# Altium PCB PCB.PcbDoc
Units mil, origin at the board's own origin, x right, y up, seen from the top; angles counter-clockwise.
Board outline 2100 x 4000 mil, 2 copper layers (Top Layer, Bottom Layer); 3 components, 8 nets, 100 pads, 1 vias.
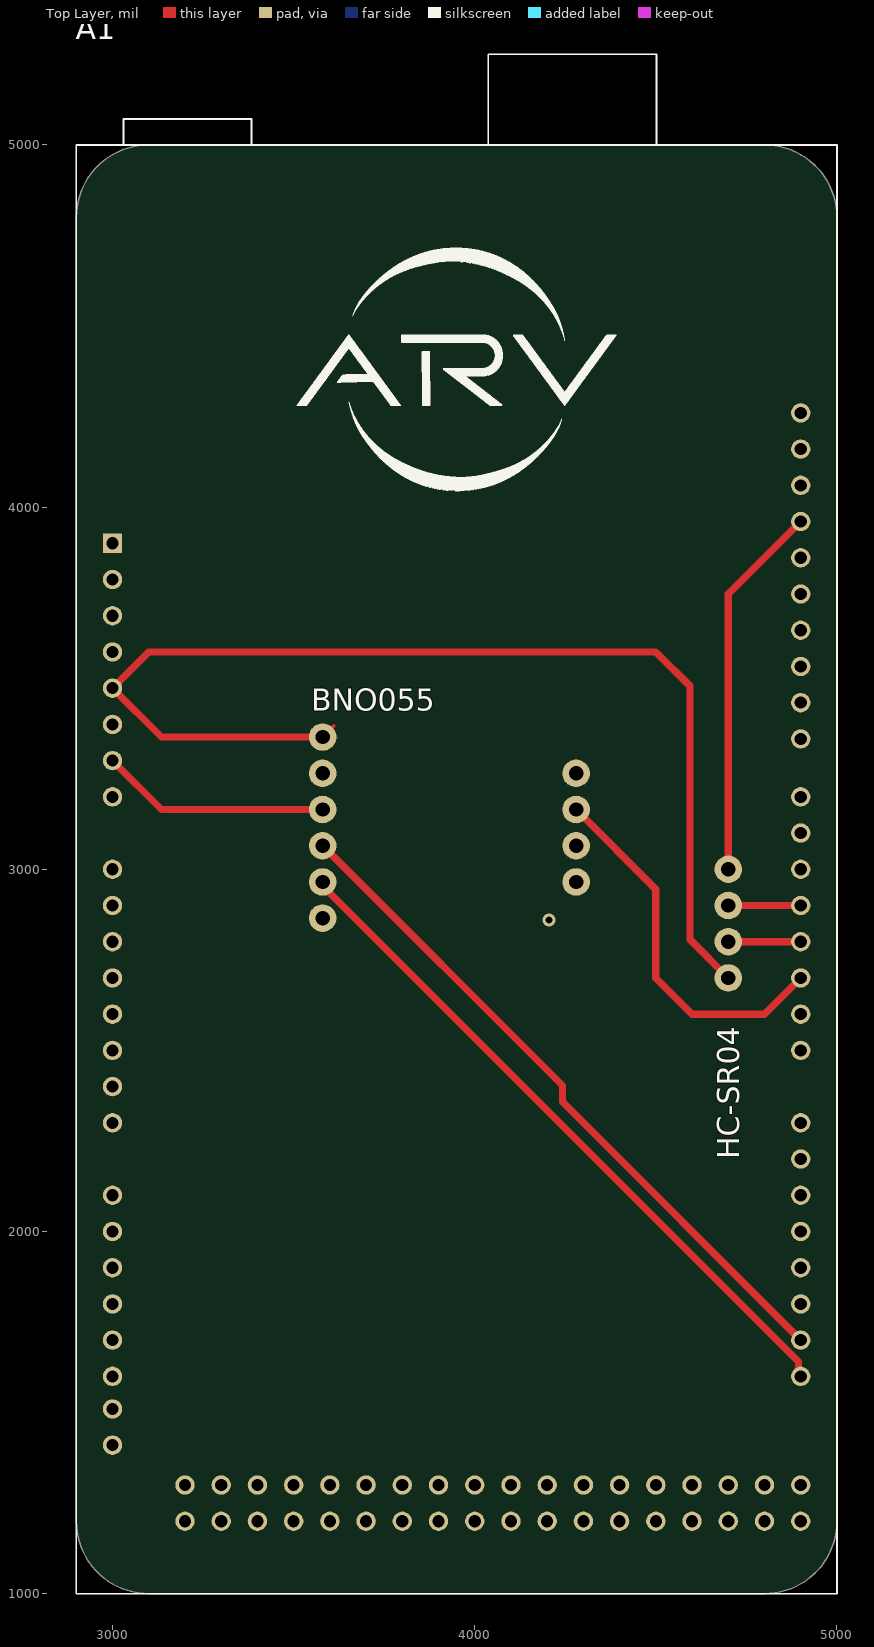
[diagram p0: Top Layer view]
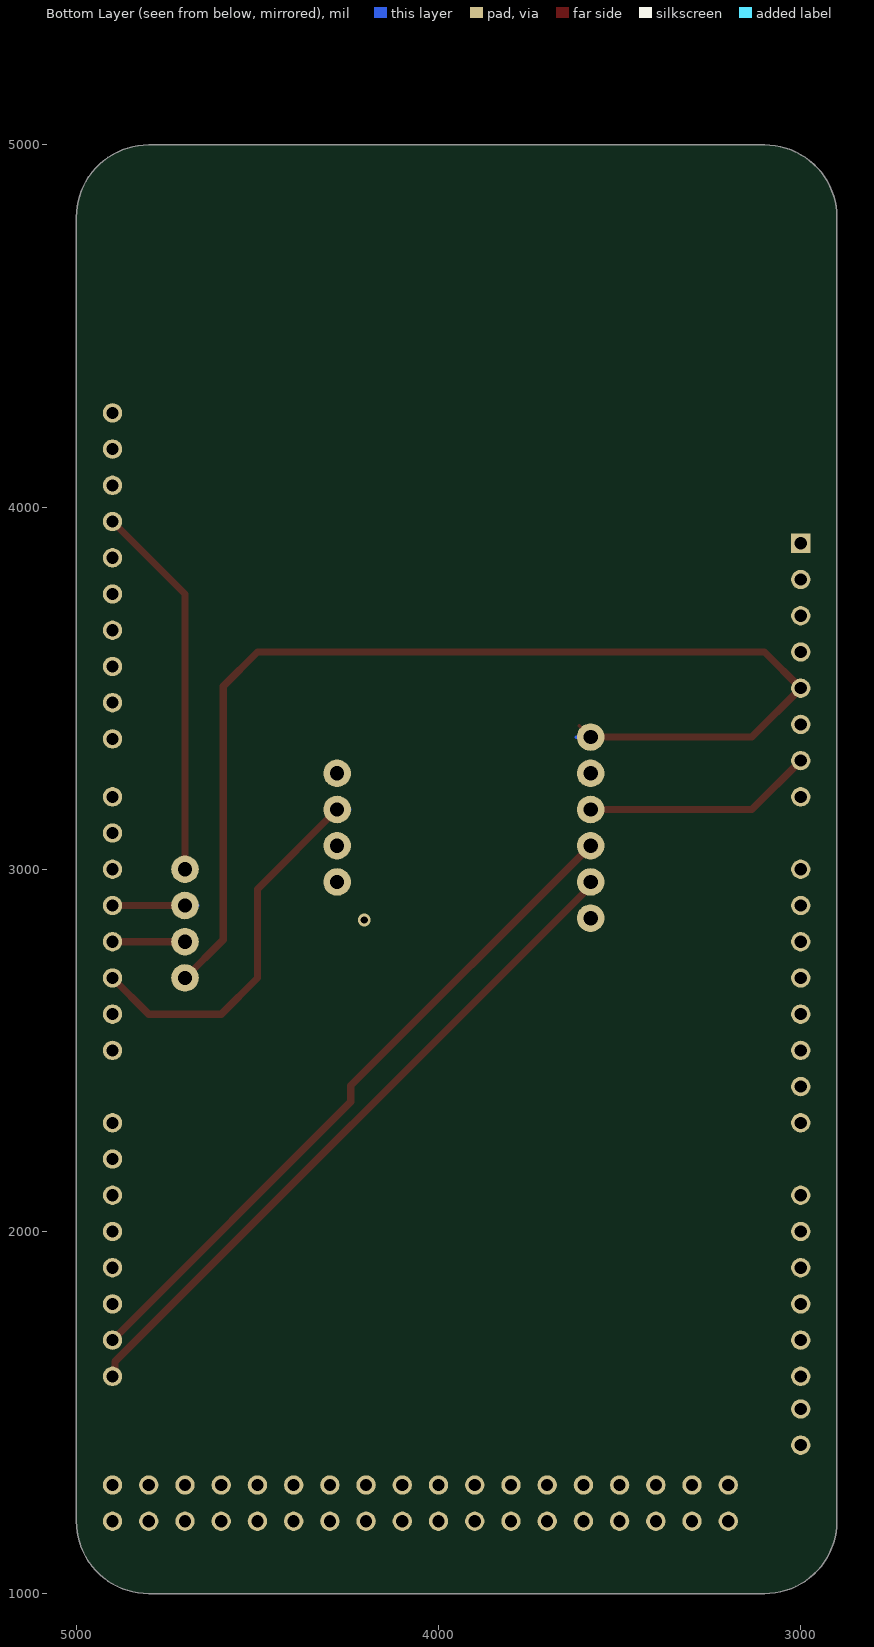
[diagram p1: Bottom Layer view, seen from below]

## Layer stack, top to bottom
Top Solder: solder mask 0.4, Solder Resist, Dk 3.5
Top Layer: signal copper 1.4
Dielectric 1: dielectric 12.6, FR-4, Dk 4.8
Bottom Layer: signal copper 1.4
Bottom Solder: solder mask 0.4, Solder Resist, Dk 3.5

## Board outline
2900,1200 2900,4800 cw(c3100,4800) 3100,5000 4800,5000 cw(c4800,4800) 5000,4800 5000,1200 cw(c4800,1200) 4800,1000 3100,1000 cw(c3100,1200)

## Design rules (kind name [scope] priority, off if disabled: settings)
Clearance [All] p1: gap=10 ignorepadtopadclearanceinfootprint=FALSE
PolygonConnect [All] p1: connectstyle=Relief reliefconductorwidth=10 reliefentries=4 polygonreliefangle="90 Angle" airgapwidth=10
RoutingVias [All] p1: holewidth=28 width=50 viastyle="Through Hole" minholewidth=28 minwidth=50 maxholewidth=28 maxwidth=50
SolderMaskExpansion [All] p1: expansion=4 istentingtop=FALSE
SupplyNets "Schematic Supply Nets_1" [InNet('GND3')] p1: voltage=0.000
SupplyNets "Schematic Supply Nets" [InNet('GND')] p2: voltage=0.000
Width [All] p1: maxlimit=20 minlimit=10 preferedwidth=20 minimp=50.000000 maximp=50.000000 favimp=50.000000
30 further rules are at their usual default settings.

## Components (designator, comment, footprint, x,y, rotation, side; value= is the part's Value field where it differs from the comment)
A1 "A000067" ARDUINO_A000067 3950,3000 r0 top
BNO055 "Adafruit BNO055" PCBComponent_1#1 3900,3200 r270 top
HC-SR04 "Component_1" PCBComponent_1#2 4470,2810 r270 top

## Footprints (in the part's own frame and the unit in brackets; to place one, negate y for a bottom-side part, rotate by r counter-clockwise, add the part's x,y. Pads: shape width x height; smd on the part's side, far side on the other; paste and mask are expansions set on the pad)
ARDUINO_A000067 [mm]
  round 1.358 hole 0.85: 0(24.13,-12.7) 1(24.13,-10.16) 2(24.13,-7.62) 3(24.13,-5.08) 3V3(-24.13,15.24) 4(24.13,-2.54) 5(24.13,0) 5V_1(-24.13,12.7) 5V_2(24.13,-43.18) 5V_3(24.13,-45.72) 6(24.13,2.54) 7(24.13,5.08) 8(24.13,9.144) 9(24.13,11.684) 10(24.13,14.224) 11(24.13,16.764) 12(24.13,19.304) 13(24.13,21.844) 14(24.13,-17.78) 15(24.13,-20.32) 16(24.13,-22.86) 17(24.13,-25.4) 18(24.13,-27.94) 19(24.13,-30.48) 20(24.13,-33.02) 21(24.13,-35.56) 22(21.59,-43.18) 23(21.59,-45.72) 24(19.05,-43.18) 25(19.05,-45.72) 26(16.51,-43.18) 27(16.51,-45.72) 28(13.97,-43.18) 29(13.97,-45.72) 30(11.43,-43.18) 31(11.43,-45.72) 32(8.89,-43.18) 33(8.89,-45.72) 34(6.35,-43.18) 35(6.35,-45.72) 36(3.81,-43.18) 37(3.81,-45.72) 38(1.27,-43.18) 39(1.27,-45.72) 40(-1.27,-43.18) 41(-1.27,-45.72) 42(-3.81,-43.18) 43(-3.81,-45.72) 44(-6.35,-43.18) 45(-6.35,-45.72) 46(-8.89,-43.18) 47(-8.89,-45.72) 48(-11.43,-43.18) 49(-11.43,-45.72) 50(-13.97,-43.18) 51(-13.97,-45.72) 52(-16.51,-43.18) 53(-16.51,-45.72) AD0(-24.13,0) AD1(-24.13,-2.54) AD2(-24.13,-5.08) AD3(-24.13,-7.62) AD4(-24.13,-10.16) AD5(-24.13,-12.7) AD6(-24.13,-15.24) AD7(-24.13,-17.78) AD8(-24.13,-22.86) AD9(-24.13,-25.4) AD10(-24.13,-27.94) AD11(-24.13,-30.48) AD12(-24.13,-33.02) AD13(-24.13,-35.56) AD14(-24.13,-37.846) AD15(-24.13,-40.386) AREF(24.13,26.924) GND1(-24.13,10.16) GND2(-24.13,7.62) GND3(24.13,24.384) GND4(-19.05,-43.18) GND5(-19.05,-45.72) IOREF(-24.13,20.32) RESET(-24.13,17.78) SCL(24.13,32.004) SDA(24.13,29.464) VIN(-24.13,5.08)
  rect 1.358x1.358 / inner round 1.358 / far side rect 1.358x1.358 hole 0.85: NC(-24.13,22.86)
  silkscreen extent -26.67,-50.8 26.67,57.15
PCBComponent_1#1 [mil]
  round 76 hole 39.37: 1(-165,-320) 2(-65,-320) 3(35,-320) 4(135,-320) 5(235,-320) 6(335,-320) 7(-65,380) 8(35,380) 9(135,380) 10(235,380)
  Top Layer lines w10: -65,-320 -65,-300 ; -165,-320 -196.18,-288.81 ; -65,347.4 -65,380
  Bottom Layer lines w10: -165,-320 -165,-280 ; 35,345 35,380 ; -65,375 -65,380 ; 135,380 125,380
PCBComponent_1#2 [mil]
  round 76 hole 39.37: 1(-190,230) 2(-90,230) 3(10,230) 4(110,230)
  Top Layer lines w10: -190,197.4 -190,230
  Bottom Layer lines w10: -90,195 -90,230 ; -190,225 -190,230 ; 10,230 0,230

## Part data
A1: "8-bit board with 54 digital pins, 16 analog inputs, and 4 serial ports.", Package="Non-Standard Arduino", Check_prices=https://www.snapeda.com/parts/Arduino%20Mega%202560%20Rev3/Arduino/view-part/?ref=eda, MF=Arduino, MP="Arduino Mega 2560 Rev3", SnapEDA_Link=https://www.snapeda.com/parts/Arduino%20Mega%202560%20Rev3/Arduino/view-part/?ref=snap
BNO055: library part Component_1

## Via types
v1: diameter 35.69/35.69 (per signal layer), hole 19.69, Top Layer to Bottom Layer, 1 vias

## Nets (pads, with @x,y where several pads share a name; then routed paths per layer and width w, separated by ;. In a path a pad name is that pad's centre, name@x,y a point inside that pad or via, vN(x,y) a via of type N, cw(c..) or ccw(c..) an arc to the next point about the centre after c; other vN are vias at no path point)
5V: A1.5V_1 BNO055.1 HC-SR04.4 | length 3160.2
  Top Layer w20: BNO055.1 3135,3365 A1.5V_1 3100,3600 4500,3600 4594.64,3505.36 4594.64,2805.36 HC-SR04.4
GND: A1.GND2 BNO055.3 | length 635.9
  Top Layer w20: A1.GND2 3135,3165 BNO055.3
GND3: A1.GND3 HC-SR04.1 | length 1042.8
  Top Layer w20: HC-SR04.1 4700,3760 A1.GND3
NetA1_2: A1.2 BNO055.8 | length 1039
  Top Layer w20: BNO055.8 4500,2945 4500,2700 4600,2600 4800,2600 A1.2
NetA1_3: A1.3 HC-SR04.3 | length 200
  Top Layer w20: HC-SR04.3 A1.3
NetA1_4: A1.4 HC-SR04.2 | length 200
  Top Layer w20: HC-SR04.2 A1.4
NetA1_20: A1.20 BNO055.4 | length 1911.8
  Top Layer w20: BNO055.4 4242.16,2402.84 4242.16,2357.84 A1.20
NetA1_21: A1.21 BNO055.5 | length 1911.8
  Top Layer w20: BNO055.5 3580,2953.91 4893.6,1640.31 4893.6,1606.4 A1.21
pads on no net: A1.0 A1.1 A1.3V3 A1.5 A1.5V_2 A1.5V_3 A1.6 A1.7 A1.8 A1.9 A1.10 A1.11 A1.12 A1.13 A1.14 A1.15 A1.16 A1.17 A1.18 A1.19 A1.22 A1.23 A1.24 A1.25 A1.26 A1.27 A1.28 A1.29 A1.30 A1.31 A1.32 A1.33 A1.34 A1.35 A1.36 A1.37 A1.38 A1.39 A1.40 A1.41 A1.42 A1.43 A1.44 A1.45 A1.46 A1.47 A1.48 A1.49 A1.50 A1.51 A1.52 A1.53 A1.AD0 A1.AD1 A1.AD2 A1.AD3 A1.AD4 A1.AD5 A1.AD6 A1.AD7 A1.AD8 A1.AD9 A1.AD10 A1.AD11 A1.AD12 A1.AD13 A1.AD14 A1.AD15 A1.AREF A1.GND1 A1.GND4 A1.GND5 A1.IOREF A1.NC A1.RESET A1.SCL A1.SDA A1.VIN BNO055.2 BNO055.6 BNO055.7 BNO055.9 BNO055.10
copper on no net:
  other v1: 4205,2860

## Silkscreen, mask and mechanical layers (free items; w line width, h text height)
Top Overlay:
  drawing of 10 lines, arcs and shapes, not listed
Mechanical 1:
  the board outline again, w10

## Text inside footprints (layer, text, board x,y; h text height)
BNO055: Mechanical 7 "Vin" at 3628.14,3398.75 h27.2 r270; Mechanical 7 "GND" at 3628.14,3199.72 h27.2 r270; Mechanical 7 "SDA" at 3628.14,3099.72 h27.2 r270; Mechanical 7 "SCL" at 3628.14,2999.72 h27.2 r270; Mechanical 7 "INT" at 4205.03,3096.23 h27.2 r270; Mechanical 7 "RST" at 3628.14,2898.14 h27.2 r270; Mechanical 7 "PS1" at 4203.14,3200.19 h27.2 r270; Mechanical 7 "3vo" at 3628.14,3303.65 h27.2 r270; Mechanical 7 "ADR" at 4203.14,2999.17 h27.2 r270; Mechanical 7 "PS0" at 4203.14,3304.72 h27.2 r270
HC-SR04: Mechanical 7 "TRIG" at 4645,2805 h27.2 r180; Mechanical 7 "ECHO" at 4635,2910 h27.2 r180; Mechanical 7 "VCC" at 4635,2710 h27.2 r182.6; Mechanical 7 "GND" at 4640,3015 h27.2 r180